# Altium PCB Quadruped_Shield_PCB_Rev2.PcbDoc
Units mil, origin at the board's own origin, x right, y up, seen from the top; angles counter-clockwise.
Board outline 5000 x 3940 mil, 2 copper layers (Top Layer, Bottom Layer); 67 components, 106 nets, 436 pads, 58 vias.
Unrouted connection lines stored in the file: 66.
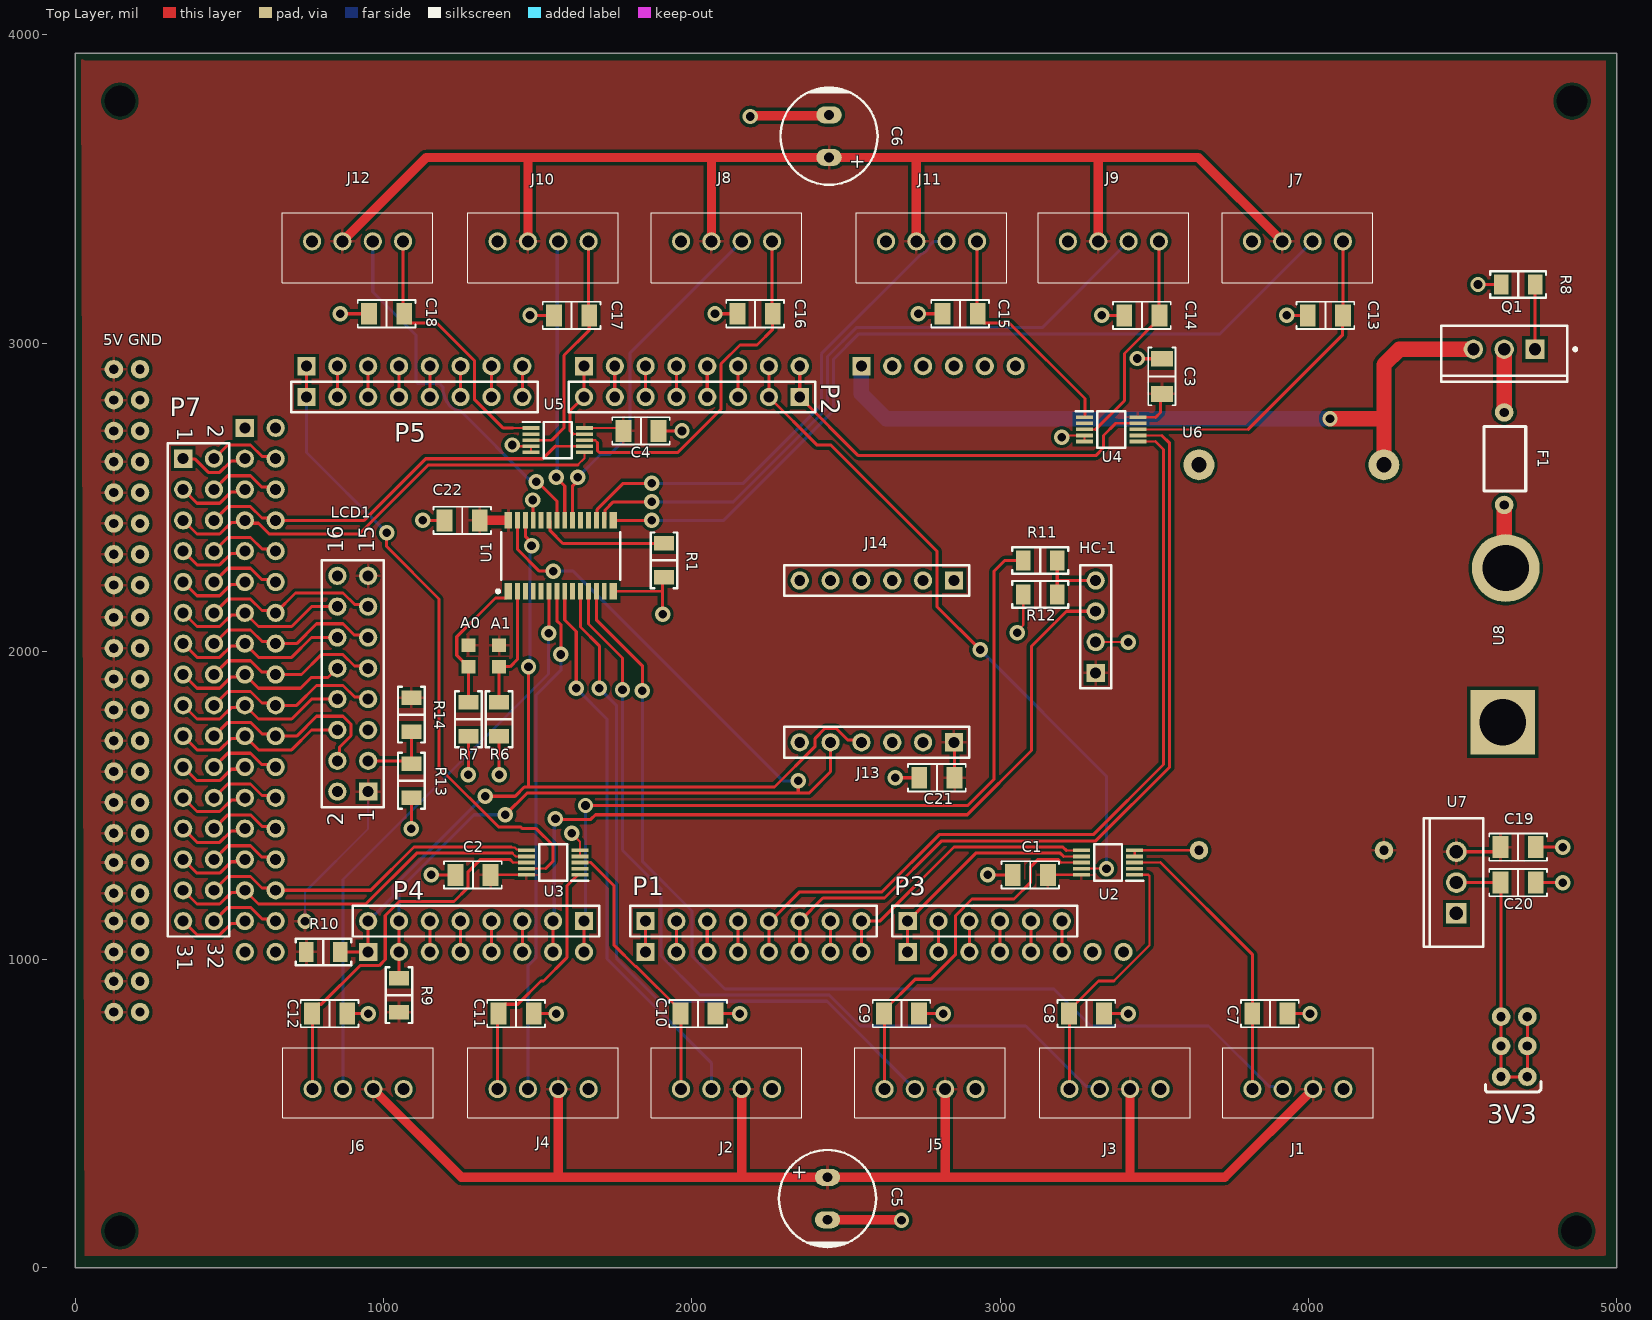
[diagram p0: Top Layer view]
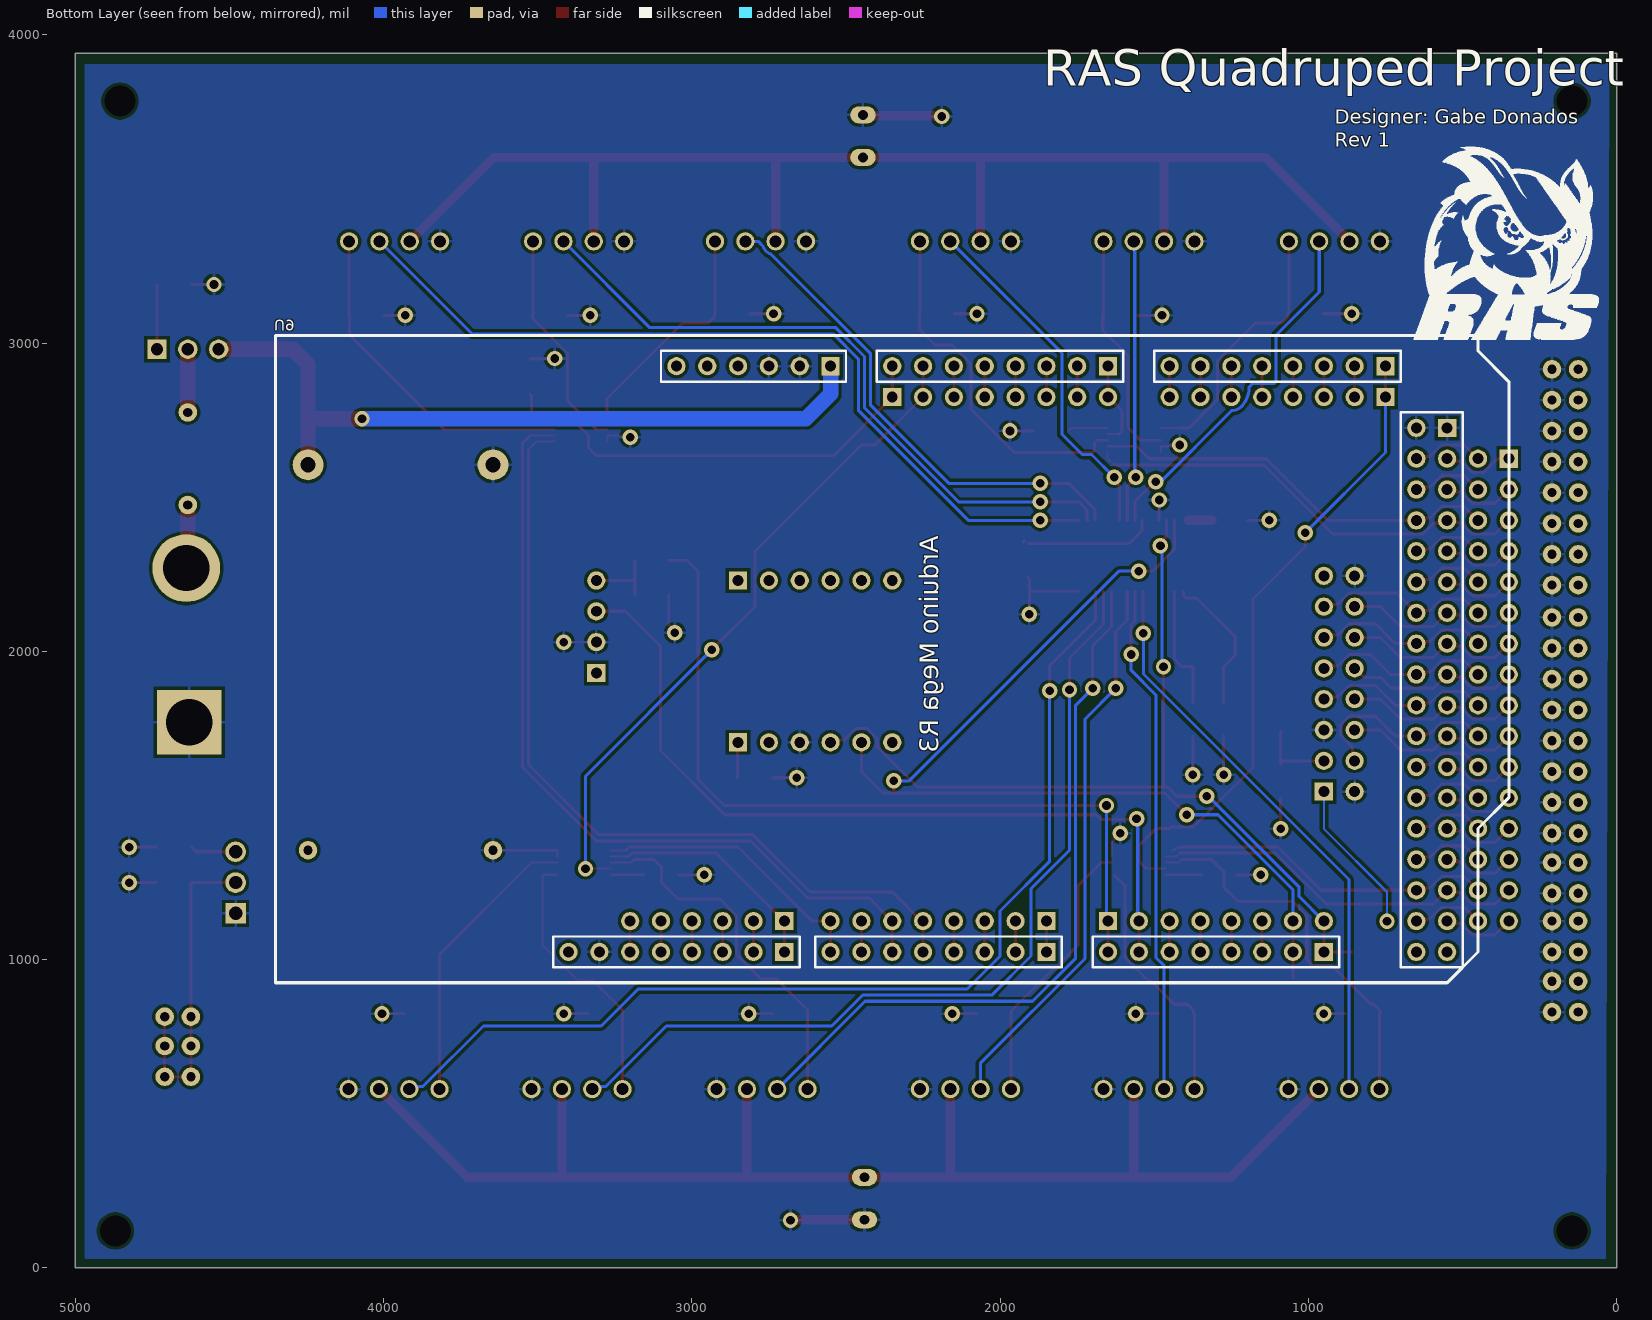
[diagram p1: Bottom Layer view, seen from below]
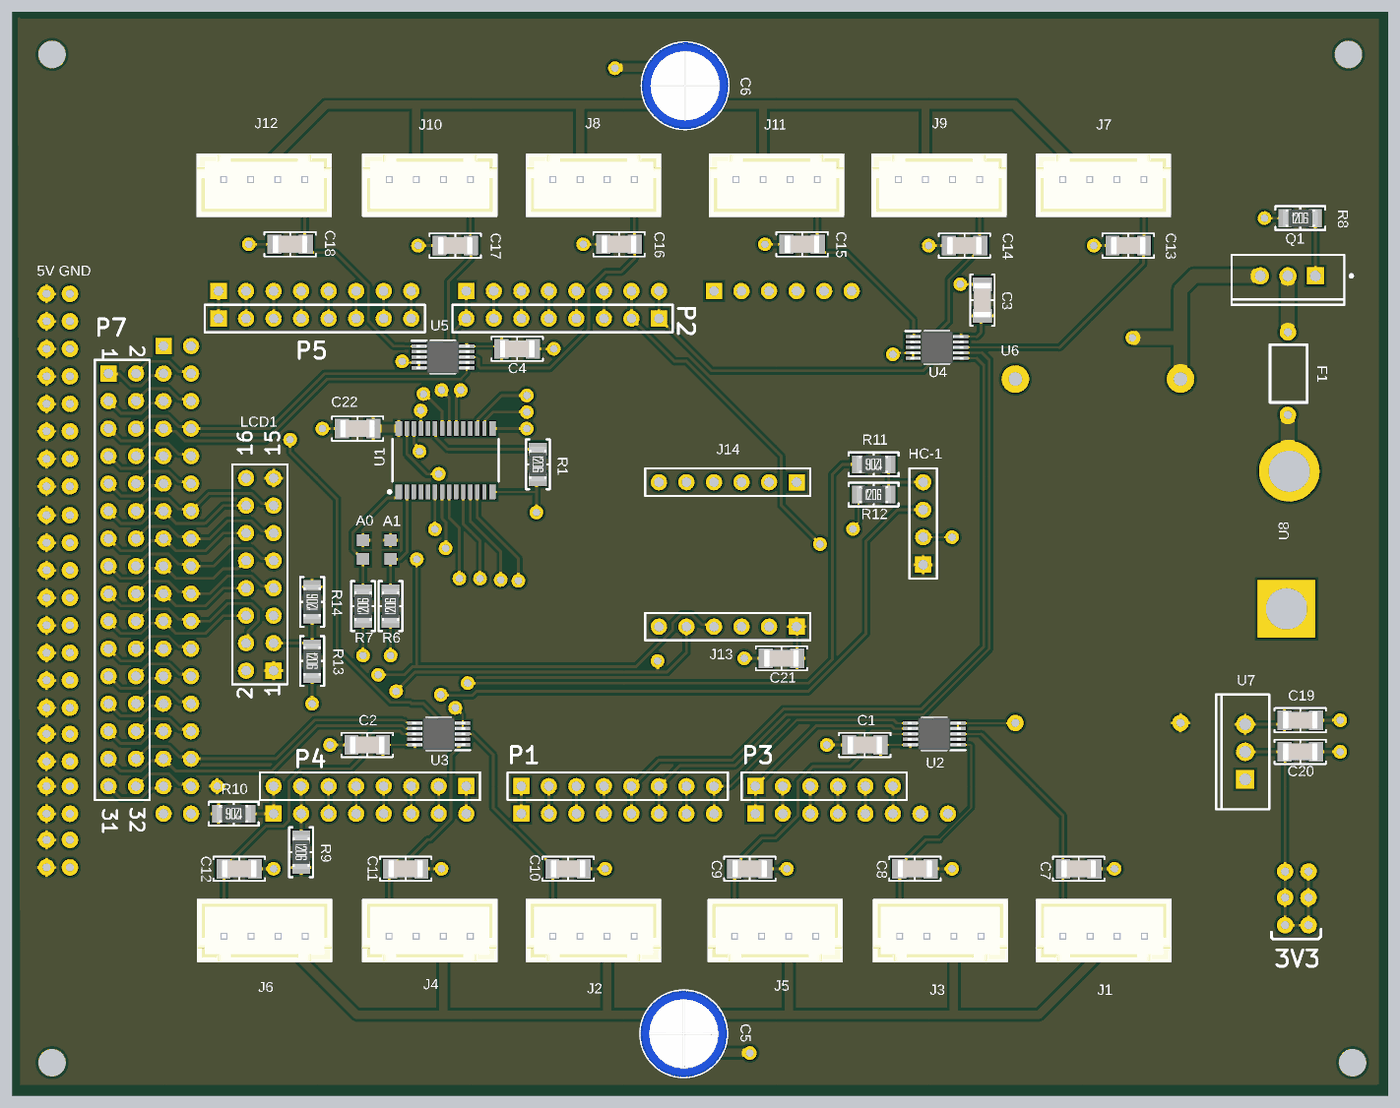
[diagram p2: 3D render of the assembled board from above, using the file's embedded part models]

## Layer stack, top to bottom
Top Solder: solder mask 0.4, Solder Resist, Dk 3.5
Top Layer: signal copper 1.4
Dielectric 1: dielectric 12.6, FR-4, Dk 4.8
Bottom Layer: signal copper 1.4
Bottom Solder: solder mask 0.4, Solder Resist, Dk 3.5

## Board outline
0,0 5000,0 5000,3940 0,3940

## Design rules (kind name [scope] priority, off if disabled: settings)
Clearance [All] p1: gap=10 ignorepadtopadclearanceinfootprint=FALSE except(0: Arc-Hole Track-Hole SMDPad-Hole THPad-Hole Via-Hole Fill-Hole Poly-Hole Region-Hole Text-Hole; 5: SMDPad-SMDPad)
HoleSize [All] p1: absolutevalues=TRUE maxlimit=200 minlimit=1 maxpercent=80.000 minpercent=20.000
MinimumSolderMaskSliver MinimumSolderMaskSliver_1 [HasFootprint('SOT361-1_V')] p1: minsoldermaskwidth=1
PolygonConnect [All] p1: connectstyle=Relief reliefconductorwidth=10 reliefentries=4 polygonreliefangle="90 Angle" airgapwidth=10
RoomDefinition U_MPU_Schem [InComponentClass('U_MPU_Schem')] p1 off: confinementstyle=ConfineIn formatcopy=TRUE lockcomponents=FALSE outline 2030.12,1180 3235.12,1180 3235.12,2410 2030.12,2410
RoomDefinition U_Power_Circuit [InComponentClass('U_Power_Circuit')] p2 off: confinementstyle=ConfineIn formatcopy=TRUE lockcomponents=FALSE outline 3540,1005 5005,1005 5005,3305 3540,3305
RoomDefinition U_PWM_BoardSchem [InComponentClass('U_PWM_BoardSchem')] p3 off: confinementstyle=ConfineIn formatcopy=TRUE lockcomponents=FALSE outline 243.11,-285 5155,-285 5155,3945 243.11,3945
RoomDefinition Main_Board [InComponentClass('Main_Board')] p4 off: confinementstyle=ConfineIn formatcopy=TRUE lockcomponents=FALSE outline -565,-385 5055,-385 5055,3795 -565,3795
RoomDefinition U_LCD_Schem [InComponentClass('U_LCD_Schem')] p5 off: confinementstyle=ConfineIn formatcopy=TRUE lockcomponents=FALSE outline 670,1425 1400,1425 1400,2490 670,2490
RoomDefinition U_HC06_Schem [InComponentClass('U_HC06_Schem')] p6 off: confinementstyle=ConfineIn formatcopy=TRUE lockcomponents=FALSE outline 2765,1840 3495,1840 3495,2360 2765,2360
RoutingVias [All] p1: holewidth=28 width=50 viastyle="Through Hole" minholewidth=28 minwidth=50 maxholewidth=28 maxwidth=50
SilkToSolderMaskClearance [IsPad] p1: minsilkscreentomaskgap=5 clearancetoexposedcopper=TRUE
SolderMaskExpansion [All] p1: expansion=4 istentingtop=FALSE
Width [All] p1: maxlimit=50 minlimit=5 preferedwidth=10
27 further rules are at their usual default settings.

## Classes and differential pairs
component class U_PWM_BoardSchem: A0 A1 C1 C2 C3 C4 C5 C6 C7 C8 C9 C10 C11 C12 C13 C14 C15 C16 C17 C18 C22 J1 J2 J3 J4 J5 J6 J7 J8 J9 J10 J11 J12 R1 R6 R7 U1 U2 U3 U4 U5
component class U_Power_Circuit: C19 C20 F1 Q1 R8 U6 U7 U8
component class U_MPU_Schem: C21 J13 J14
component class U_LCD_Schem: LCD1 R13 R14
component class U_HC06_Schem: HC-1 R11 R12
component class Main_Board: P1 P2 P3 P4 P5 P7 R9 R10 U9

## Components (designator, comment, footprint, x,y, rotation, side; value= is the part's Value field where it differs from the comment)
A0 "SB" CAPC2010X06N 1275,1985 r270 top
A1 "SB" CAPC2010X06N 1375,1985 r270 top
C1 "0.1 µF" "CAP 1206_3216 - 0.8MM" 3097.91,1275 r0 top
C2 "0.1 µF" "CAP 1206_3216 - 0.8MM" 1290,1275 r0 top
C3 "0.1 µF" "CAP 1206_3216 - 0.8MM" 3525,2892.09 r270 top
C4 "0.1 µF" "CAP 1206_3216 - 0.8MM" 1835,2715 r180 top
C5 "330 µF" "CAP TH ALPOLY D8.00mm S3.50mm H9.00mm" 2440,225 r90 top
C6 "330 µF" "CAP TH ALPOLY D8.00mm S3.50mm H9.00mm" 2445,3671.1 r270 top
C7 "0.1 µF" "CAP 1206_3216 - 0.8MM" 3875,825 r180 top
C8 "0.1 µF" "CAP 1206_3216 - 0.8MM" 3280,825 r180 top
C9 "0.1 µF" "CAP 1206_3216 - 0.8MM" 2680,825 r180 top
C10 "0.1 µF" "CAP 1206_3216 - 0.8MM" 2020,825 r180 top
C11 "0.1 µF" "CAP 1206_3216 - 0.8MM" 1430,825 r180 top
C12 "0.1 µF" "CAP 1206_3216 - 0.8MM" 825,825 r180 top
C13 "0.1 µF" "CAP 1206_3216 - 0.8MM" 4055,3090 r0 top
C14 "0.1 µF" "CAP 1206_3216 - 0.8MM" 3460,3090 r0 top
C15 "0.1 µF" "CAP 1206_3216 - 0.8MM" 2870,3095 r0 top
C16 "0.1 µF" "CAP 1206_3216 - 0.8MM" 2205,3095 r0 top
C17 "0.1 µF" "CAP 1206_3216 - 0.8MM" 1610,3090 r0 top
C18 "0.1 µF" "CAP 1206_3216 - 0.8MM" 1010,3095 r0 top
C19 "0.33F" "CAP 1206_3216 - 0.8MM" 4680,1365 r180 top
C20 "0.1 µF" "CAP 1206_3216 - 0.8MM" 4680,1250 r180 top
C21 "0.1 µF" "CAP 1206_3216 - 0.8MM" 2795,1590 r0 top
C22 "0.1 µF" "CAP 1206_3216 - 0.8MM" 1255,2425 r180 top
F1 "Through Hole Fuse" "Through Hole Fuse-Footprint-1" 4640,2625 r90 top
HC-1 "Header 4" HDR1X4 3310,1930 r90 top
J1 "B4B-XH-A_LF__SN_" B4BXHALFSN 3818.15,580 r0 top locked
J2 "B4B-XH-A_LF__SN_" B4BXHALFSN 1964.72,580 r0 top locked
J3 "B4B-XH-A_LF__SN_" B4BXHALFSN 3224.72,580 r0 top locked
J4 "B4B-XH-A_LF__SN_" B4BXHALFSN 1369.72,580 r0 top locked
J5 "B4B-XH-A_LF__SN_" B4BXHALFSN 2624.72,580 r0 top locked
J6 "B4B-XH-A_LF__SN_" B4BXHALFSN 769.72,580 r0 top locked
J7 "B4B-XH-A_LF__SN_" B4BXHALFSN 4111.85,3330 r180 top locked
J8 "B4B-XH-A_LF__SN_" B4BXHALFSN 2260.28,3330 r180 top locked
J9 "B4B-XH-A_LF__SN_" B4BXHALFSN 3515,3330 r180 top locked
J10 "B4B-XH-A_LF__SN_" B4BXHALFSN 1665,3330 r180 top locked
J11 "B4B-XH-A_LF__SN_" B4BXHALFSN 2925,3330 r180 top locked
J12 "B4B-XH-A_LF__SN_" B4BXHALFSN 1063.43,3330 r180 top locked
J13 "" HDR1X6 2850,1705 r180 top locked
J14 "" HDR1X6 2850,2230 r180 top locked
LCD1 "Header 8X2" HDR2X8 950,1545 r90 top
P1 "Header 8" HDR1X8 1850,1125 r0 top
P2 "Header 8" HDR1X8 2350,2825 r180 top
P3 "Header 6" HDR1X6 2700,1125 r0 top
P4 "Header 8" HDR1X8 1650,1125 r180 top
P5 "Header 8" HDR1X8 750,2825 r0 top
P7 "Header 16X2" HDR2X16 350,2625 r270 top
Q1 "SPP15P10P H" INF-PG-TO220-3-1_A_V 4635,2980 r270 top
R1 "10K" "RES 1206_3216" 1910,2295.12 r270 top value="10 kOhms"
R6 "10K" "RES 1206_3216" 1375,1779.88 r90 top value="10 kOhms"
R7 "10K" "RES 1206_3216" 1275,1779.88 r90 top value="10 kOhms"
R8 "100" "RES 1206_3216" 4680,3190 r0 top value="10 kOhms"
R9 "10K" "RES 1206_3216" 1050,885 r270 top value="10 kOhms"
R10 "10K" "RES 1206_3216" 805,1025 r180 top value="10 kOhms"
R11 "1k" "RES 1206_3216" 3130,2295 r180 top value="10 kOhms"
R12 "1k" "RES 1206_3216" 3130,2185 r0 top value="10 kOhms"
R13 "1k" "RES 1206_3216" 1090,1580 r270 top value="10 kOhms"
R14 "47k" "RES 1206_3216" 1090,1795 r90 top value="10 kOhms"
U1 "PCA9685PW,112" SOT361-1_V 1575,2310 r90 top
U2 "MAX4524LEUB+" SOP50P490X110-10N 3350,1315 r180 top
U3 "MAX4524LEUB+" SOP50P490X110-10N 1550,1315 r180 top
U4 "MAX4524LEUB+" SOP50P490X110-10N 3360,2720 r0 top
U5 "MAX4524LEUB+" SOP50P490X110-10N 1565,2685 r0 top
U6 "5V 3A Buck Converter" "5V 3A Buck Converter-Footprint-1" 3945,2000 r270 top
U7 "LD1117" "PCB - LEADED - TO - TO-220" 4480,1250 r180 top
U8 "3S LiPo Input" "3S LiPo Input-Footprint-2" 4635,2020 r90 top
U9 "ARDUINO MEGA" "ARDUINO MEGA" 2250,1925 r180 bottom locked

## Footprints (in the part's own frame and the unit in brackets; to place one, negate y for a bottom-side part, rotate by r counter-clockwise, add the part's x,y. Pads: shape width x height; smd on the part's side, far side on the other; paste and mask are expansions set on the pad)
"3S LiPo Input-Footprint-2" [mil]
  round 220 hole 150: 1(250,-5)
  rect 210x210 hole 150: 2(-250,5)
"5V 3A Buck Converter-Footprint-1" [mil]
  round 100 hole 50: 1(-605,300) 2(-605,-300)
  round 60 hole 30: 3(645,-300) 4(645,300)
"ARDUINO MEGA" [mm] "Arduino Mega 2560"
  rect 1.5x1.5 hole 0.9: 0(10.16,-22.86) 8(-11.43,-22.86) 21(33.02,-22.86) 59(-7.62,25.4) 67(15.24,25.4) 75(38.1,25.4) 79(43.18,20.32)
  round 1.5 hole 0.9: 1(7.62,-22.86) 2(5.08,-22.86) 3(2.54,-22.86) 4(0,-22.86) 5(-2.54,-22.86) 6(-5.08,-22.86) 7(-7.62,-22.86) 9(-13.97,-22.86) 10(-16.51,-22.86) 11(-19.05,-22.86) 12(-21.59,-22.86) 13(-24.13,-22.86) 14(15.24,-22.86) 15(17.78,-22.86) 16(20.32,-22.86) 17(22.86,-22.86) 18(25.4,-22.86) 19(27.94,-22.86) 20(30.48,-22.86) 22(40.64,-20.32) 23(43.18,-20.32) 24(40.64,-17.78) 25(43.18,-17.78) 26(40.64,-15.24) 27(43.18,-15.24) 28(40.64,-12.7) 29(43.18,-12.7) 30(40.64,-10.16) 31(43.18,-10.16) 32(40.64,-7.62) 33(43.18,-7.62) 34(40.64,-5.08) 35(43.18,-5.08) 36(40.64,-2.54) 37(43.18,-2.54) 38(40.64,0) 39(43.18,0) 40(40.64,2.54) 41(43.18,2.54) 42(40.64,5.08) 43(43.18,5.08) 44(40.64,7.62) 45(43.18,7.62) 46(40.64,10.16) 47(43.18,10.16) 48(40.64,12.7) 49(43.18,12.7) 50(40.64,15.24) 51(43.18,15.24) 52(40.64,17.78) 53(43.18,17.78) 54(-20.32,25.4) 55(-17.78,25.4) 56(-15.24,25.4) 57(-12.7,25.4) 58(-10.16,25.4) 60(-2.54,25.4) 61(0,25.4) 62(2.54,25.4) 63(5.08,25.4) 64(7.62,25.4) 65(10.16,25.4) 66(12.7,25.4) 68(20.32,25.4) 69(22.86,25.4) 70(25.4,25.4) 71(27.94,25.4) 72(30.48,25.4) 73(33.02,25.4) 74(35.56,25.4) 76(-26.67,-22.86) 77(-29.21,-22.86) 78(40.64,20.32) 80(43.18,-22.86) 81(40.64,-22.86)
  silkscreen extent -53.34,-25.4 48.26,27.94
B4BXHALFSN [mm]
  round 1.5 hole 1: 1(0,0) 2(2.5,0) 3(5,0) 4(7.5,0)
  silkscreen extent -2.45,-2.35 9.95,3.4, body extent -2.45,-2.35 9.95,3.4, height 7.52
"CAP 1206_3216 - 0.8MM" [mm] "Chip Capacitor, 2-Leads, Body 3.25x1.60mm, IPC Medium Density"
  rect 1.3x1.8 smd: 1(-1.45,0) 2(1.45,0)
  silkscreen extent -2.38,-1.13 2.38,1.13, body extent -1.6,-0.8 1.6,0.8, height 0.8
"CAP TH ALPOLY D8.00mm S3.50mm H9.00mm" [mm] "8.00mm Diameter 9.00mm Lead Spacing Aluminum - Polymer Capacitors Radial, Can"
  oval 1.4x2.1 hole 0.8: 1(1.75,0) 2(-1.75,0)
  silkscreen extent -4,-4 4,4, body extent -4.01,-4 4,4, height 9
CAPC2010X06N [mm] "Chip Capacitor, 2-Leads, Body 2.00x1.00mm, IPC Medium Density"
  rect 1.1x1.15 smd: 1(-0.875,0) 2(0.875,0)
  body extent -1,-0.5 1,0.5, height 0.6
HDR1X4 [mm] "Connector; Header; 4 Position"
  rect 1.5x1.5 hole 0.9: 1(0,0)
  round 1.5 hole 0.9: 2(2.54,0) 3(5.08,0) 4(7.62,0)
  silkscreen extent -1.27,-1.27 8.89,1.27
HDR1X6 [mm] "Connector; Header; 6 Position"
  rect 1.5x1.5 hole 0.9: 1(0,0)
  round 1.5 hole 0.9: 2(2.54,0) 3(5.08,0) 4(7.62,0) 5(10.16,0) 6(12.7,0)
  silkscreen extent -1.27,-1.27 13.97,1.27
HDR1X8 [mm] "Connector; Header; 8 Position"
  rect 1.5x1.5 hole 0.9: 1(0,0)
  round 1.5 hole 0.9: 2(2.54,0) 3(5.08,0) 4(7.62,0) 5(10.16,0) 6(12.7,0) 7(15.24,0) 8(17.78,0)
  silkscreen extent -1.27,-1.27 19.05,1.27
HDR2X8 [mm] "Connector; Header; 8x2 Position"
  rect 1.5x1.5 hole 0.9: 1(0,0)
  round 1.5 hole 0.9: 2(0,2.54) 3(2.54,0) 4(2.54,2.54) 5(5.08,0) 6(5.08,2.54) 7(7.62,0) 8(7.62,2.54) 9(10.16,0) 10(10.16,2.54) 11(12.7,0) 12(12.7,2.54) 13(15.24,0) 14(15.24,2.54) 15(17.78,0) 16(17.78,2.54)
  silkscreen extent -1.27,-1.27 19.05,3.81
HDR2X16 [mm] "Connector; Header; 16x2 Position"
  rect 1.5x1.5 hole 0.9: 1(0,0)
  round 1.5 hole 0.9: 2(0,2.54) 3(2.54,0) 4(2.54,2.54) 5(5.08,0) 6(5.08,2.54) 7(7.62,0) 8(7.62,2.54) 9(10.16,0) 10(10.16,2.54) 11(12.7,0) 12(12.7,2.54) 13(15.24,0) 14(15.24,2.54) 15(17.78,0) 16(17.78,2.54) 17(20.32,0) 18(20.32,2.54) 19(22.86,0) 20(22.86,2.54) 21(25.4,0) 22(25.4,2.54) 23(27.94,0) 24(27.94,2.54) 25(30.48,0) 26(30.48,2.54) 27(33.02,0) 28(33.02,2.54) 29(35.56,0) 30(35.56,2.54) 31(38.1,0) 32(38.1,2.54)
  silkscreen extent -1.27,-1.27 39.37,3.81
INF-PG-TO220-3-1_A_V [mm] "FM, 3-Leads, Body 10.03x8.98mm, Pitch 2.54mm"
  rect 1.6x1.6 hole 1: 1(0,2.54)
  round 1.6 hole 1: 2(0,0) 3(0,-2.54)
  silkscreen extent -1.93,-5.2 2.67,5.98, body extent -1.93,-5.2 2.67,5.2, height 20.75
"PCB - LEADED - TO - TO-220" [mm]
  rect 1.7x1.7 hole 1.1: 1(0,2.54)
  round 1.7 hole 1.1: 2(0,0) 3(0,-2.54)
  silkscreen extent -2.21,-5.3 2.68,5.3, body extent -2.19,-5.28 2.66,5.28, height 19.85
"RES 1206_3216" [mm] "Chip Resistor, 2-Leads, Body 3.13x1.55mm, IPC Medium Density"
  rect 1.2x1.65 smd: 1(-1.4,0) 2(1.4,0)
  silkscreen extent -2.3,-1.1 2.3,1.1, body extent -1.6,-0.8 1.6,0.8, height 0.6
SOP50P490X110-10N [mm]
  rect 1.4x0.3 smd: 1(-2.2,1) 2(-2.2,0.5) 3(-2.2,0) 4(-2.2,-0.5) 5(-2.2,-1) 6(2.2,-1) 7(2.2,-0.5) 8(2.2,0) 9(2.2,0.5) 10(2.2,1)
  silkscreen extent -2.9,-1.5 1.15,1.5, body extent -2.45,-1.5 2.45,1.5, height 1.1
SOT361-1_V [mm] "SOP, 28-Leads, Body 9.7x4.4mm, Pitch 0.65mm, NXP Recommended"
  rect 1.35x0.6 smd: 1(-2.925,4.325) 14(-2.925,-4.325) 15(2.925,-4.325) 28(2.925,4.325)
  rect 1.35x0.4 smd: 2(-2.925,3.575) 3(-2.925,2.925) 4(-2.925,2.275) 5(-2.925,1.625) 6(-2.925,0.975) 7(-2.925,0.325) 8(-2.925,-0.325) 9(-2.925,-0.975) 10(-2.925,-1.625) 11(-2.925,-2.275) 12(-2.925,-2.925) 13(-2.925,-3.575) 16(2.925,-3.575) 17(2.925,-2.925) 18(2.925,-2.275) 19(2.925,-1.625) 20(2.925,-0.975) 21(2.925,-0.325) 22(2.925,0.325) 23(2.925,0.975) 24(2.925,1.625) 25(2.925,2.275) 26(2.925,2.925) 27(2.925,3.575)
  silkscreen extent -3.05,-4.9 1.96,5.3, body extent -2.2,-4.85 2.2,4.85, height 1.1
"Through Hole Fuse-Footprint-1" [mil]
  round 60 hole 30: 1(-150,5) 2(150,5)
  silkscreen extent -105,-65 105,70

## Part data
A0 A1: library part CMP-00004-5, "Solder Bridge/0 ohm"
C1 C2 C3 C4 C7 C8 C9 C10 C11 C12 C13 C14 C15 C16 C17 C18 C20 C21 C22: library part CC1206ZRY5V9BB104, "CAP CER 0.1UF 50V Y5V 1206", Device Package="1206 (3216 Metric)", manufacturer=Yageo, Operating Temperature="-30°C ~ 85°C", Supplier Part Number 1=311-4505-1-ND, Temperature Coefficient="Y5V (F)", Tolerance="-20%, +80%", Voltage - Rated=50V, Applications="General Purpose", Capacitance="0.1 µF", componentlink1description=Datasheet, componentlink1url=http://www.yageo.com/NewPortal/_en/search/productDocs.jsp?YageoPartNumber=CC1206ZRY5V9BB104, componentlink2description="DigiKey Link", componentlink2url=https://www.digikey.com/en/products/detail/yageo/CC1206ZRY5V9BB104/5884687, lastupdated="9/19/2022 1:06:25 PM", Lifecycle Status=Active, Minimum Order=1, Mounting Type="Surface Mount, MLCC", Package / Case="1206 (3216 Metric)", packaging=TapeAndReel, Part Number=CC1206ZRY5V9BB104, Part Status=Active, partid=18813, price=0.04, series=CC, Size / Dimension="0.126\" L x 0.063\" W (3.20mm x 1.60mm)", Supplier 1=DigiKey, Thickness (Max)="0.028\" (0.70mm)"
C5 C6: library part RL81C331MDN1KX, "CAP ALUM POLY 330UF 20% 16V T/H", Device Package="Radial, Can", ESR (Equivalent Series Resistance)=12mOhm, Lifetime @ Temp.="2000 Hrs @ 105°C", manufacturer=Nichicon, Operating Temperature="-55°C ~ 105°C", Ripple Current @ High Frequency="5 A @ 100 kHz", Ripple Current @ Low Frequency="500 mA @ 120 Hz", Supplier Part Number 1=493-6629-1-ND, Tolerance=±20%, Voltage - Rated="16 V", Applications="General Purpose", Capacitance="330 µF", componentlink1description=Datasheet, componentlink1url=http://nichicon-us.com/english/products/pdfs/e-rl8.pdf, componentlink2description="DigiKey Link", componentlink2url=https://www.digikey.com/en/products/detail/nichicon/RL81C331MDN1KX/3465929, Height - Seated (Max)="0.354\" (9.00mm)", lastupdated="9/19/2022 2:07:31 PM", Lead Spacing="0.138\" (3.50mm)", Lifecycle Status=Active, Minimum Order=1, Mounting Type="Through Hole", Package / Case="Radial, Can", packaging=TapeAndBox, Part Number=RL81C331MDN1KX, Part Status=Active, partid=3754, price=0.43, series="FPCAP, RL8", Size / Dimension="0.315\" Dia (8.00mm)", Supplier 1=DigiKey, Type=Polymer
C19: library part CC1206ZRY5V9BB104, "CAP CER 0.1UF 50V Y5V 1206", Capacitance="0.1 µF", Device Package="1206 (3216 Metric)", manufacturer=Yageo, Operating Temperature="-30°C ~ 85°C", Supplier Part Number 1=311-4505-1-ND, Temperature Coefficient="Y5V (F)", Tolerance="-20%, +80%", Voltage - Rated=50V, Applications="General Purpose", componentlink1description=Datasheet, componentlink1url=http://www.yageo.com/NewPortal/_en/search/productDocs.jsp?YageoPartNumber=CC1206ZRY5V9BB104, componentlink2description="DigiKey Link", componentlink2url=https://www.digikey.com/en/products/detail/yageo/CC1206ZRY5V9BB104/5884687, lastupdated="9/19/2022 1:06:25 PM", Lifecycle Status=Active, Minimum Order=1, Mounting Type="Surface Mount, MLCC", Package / Case="1206 (3216 Metric)", packaging=TapeAndReel, Part Number=CC1206ZRY5V9BB104, Part Status=Active, partid=18813, price=0.04, series=CC, Size / Dimension="0.126\" L x 0.063\" W (3.20mm x 1.60mm)", Supplier 1=DigiKey, Thickness (Max)="0.028\" (0.70mm)"
F1: library part CMP-00003-2, "Fuse that be through the hole"
HC-1: "Header, 4-Pin", LatestRevisionDate=17-Jul-2002, LatestRevisionNote="Re-released for DXP Platform.", Publisher="Altium Limited"
J1 J2 J3 J4 J5 J6 J7 J8 J9 J10 J11 J12: "Connector", Arrow Part Number=B4B-XH-A(LF)(SN), Manufacturer_Name="JST (JAPAN SOLDERLESS TERMINALS)", Arrow Price/Stock=https://www.arrow.com/en/products/b4b-xh-a-lf-sn/jst-manufacturing, Datasheet Link=https://datasheet.lcsc.com/szlcsc/JST-Sales-America-B4B-XH-A-LF-SN_C144395.pdf, Height=7mm, Manufacturer_Part_Number=B4B-XH-A(LF)(SN)
J13 J14: library part "Header 6", "Header, 6-Pin", LatestRevisionDate=17-Jul-2002, LatestRevisionNote="Re-released for DXP Platform.", Publisher="Altium Limited"
LCD1: "Header, 8-Pin, Dual row", LatestRevisionDate=17-Jul-2002, LatestRevisionNote="Re-released for DXP Platform.", Publisher="Altium Limited"
P1 P2 P4 P5: "Header, 8-Pin", LatestRevisionDate=17-Jul-2002, LatestRevisionNote="Re-released for DXP Platform.", Publisher="Altium Limited"
P3: "Header, 6-Pin", LatestRevisionDate=17-Jul-2002, LatestRevisionNote="Re-released for DXP Platform.", Publisher="Altium Limited"
P7: "Header, 16-Pin, Dual row", LatestRevisionDate=17-Jul-2002, LatestRevisionNote="Re-released for DXP Platform.", Publisher="Altium Limited"
Q1: library part CMP-1099-00049-1, "P-Channel SIPMOS Small-Signal-Transistor, -100 V VDS, -15 A ID, -55 to 175 degC, PG-TO220-3-1, Tube, Green", manufacturer=Infineon, componentlink1description="Manufacturer URL", componentlink1url=http://www.infineon.com/, componentlink2description=Datasheet, componentlink2url=http://www.infineon.com/dgdl/SPP15P10P+H+G_Rev1.7.pdf?folderId=db3a304314dca38901154a72e3951a65&fileId=db3a3043321e49940132246d96be5a7e, ComponentLink3Description="Package Specification", ComponentLink3URL=http://www.infineon.com/dgdl/IPP028N08N3_Rev1%5B1%5D.0.pdf?folderId=db3a304313b8b5a60113cee8763b02d7&fileId=db3a30432313ff5e0123a3c08e7326b5, DatasheetVersion="Rev. 1.7", Green=TRUE, Halogen-free=TRUE, ID (max)="-15Â A", IDpuls (max)="-60Â A", Mounting Technology="Through Hole", PackageDescription="3-Pin Plastic (Green) Transistor Single Outline Package, 10.03 x 8.98 mm Body, 2.54 mm Pitch", PackageReference=PG-TO220-3-1, PackageVersion="Rev. 05, 08/2007", Packing=Tube, PartNumber="SPP15P10P H", Pto t (max)="128Â W", QG="37Â nC", RDS (on) (max)="240Â mOhm", Rth="1.17Â K/W", RthJC (max)="1.17Â K/W", VDS (max)="-100Â V", VGS(th) (max)="-2.1Â V", VGS(th) (min)="-4Â V"
R1 R6 R7 R8 R9 R10 R11 R12 R13 R14: library part ESR18EZPF1002, "RES SMD 10K OHM 1% 1/2W 1206", Device Package="1206 (3216 Metric)", manufacturer="Rohm Semiconductor", Operating Temperature="-55°C ~ 155°C", Power (Watts)="0.5W, 1/2W", Ratings=AEC-Q200, Resistance="10 kOhms", Supplier Device Package=1206, Supplier Part Number 1=RHM10.0KAFCT-ND, Temperature Coefficient=±100ppm/°C, Tolerance=±1%, componentlink1description=Datasheet, componentlink1url=https://www.rohm.com/datasheet/ESR01MZPF/esr-e, componentlink2description="DigiKey Link", componentlink2url=https://www.digikey.com/en/products/detail/rohm-semiconductor/ESR18EZPF1002/1983592, Composition="Thick Film", Features="Automotive AEC-Q200, Pulse Withstanding", Height - Seated (Max)="0.026\" (0.65mm)", lastupdated="9/19/2022 1:29:57 PM", Lifecycle Status=Active, Minimum Order=1, Number of Terminations=2, Package / Case="1206 (3216 Metric)", packaging=TapeAndReel, Part Number=ESR18EZPF1002, Part Status=Active, partid=26965, price=0.02, series=ESR, Size / Dimension="0.126\" L x 0.063\" W (3.20mm x 1.60mm)", Supplier 1=DigiKey
U1: library part CMP-1595-00004-2, "16-Channel, 12-Bit PWM Fm+ I2C-Bus LED Controller, 2.3 to 5.5 V, -40 to 85 degC, 28-Pin TSSOP (SOT361-1), RoHS, Tape and Reel", Frequency="25000000 Hz", PartNumber=PCA9685, Supply Current Max="10 mA", Supply Voltage Max="5.5 V", Supply Voltage Min="2.3 V", Temperature Max="85 degC", Temperature Min="-40 degC", Code_JEDEC=MO-153, componentlink1description="Manufacturer URL", componentlink1url=http://www.nxp.com/, componentlink2description=Datasheet, componentlink2url=http://www.nxp.com/documents/data_sheet/PCA9685.pdf, ComponentLink3Description="Package Specification", ComponentLink3URL=http://www.nxp.com/documents/outline_drawing/sot361-1_po.pdf, DatasheetVersion="Rev. 4", Mounting Technology="Surface Mount", PackageDescription="28-Pin Small Outline Package, Body 9.7 x 4.4 mm, Pitch 0.65 mm", PackageVersion=02/2003, Packing="Tape and Reel", RoHS=TRUE
U2 U3 U4 U5: "Integrated Circuit", Manufacturer_Name="Maxim Integrated", Mouser Part Number=700-MAX4524LEUB+, Datasheet Link=https://datasheets.maximintegrated.com/en/ds/MAX4524L-MAX4525L.pdf, Height=1.1mm, Manufacturer_Part_Number=MAX4524LEUB+, Mouser Price/Stock=https://www.mouser.co.uk/ProductDetail/Maxim-Integrated/MAX4524LEUB%2b?qs=Mc2rGIXtnyWlO7eYhLJKZQ%3D%3D
U6: library part CMP-00002-2, "Adafruit RC Buck converter"
U7: library part 776, "Linear Voltage Regulator IC  1 Output  1A TO-220AB", Dropout Voltage="1.3V @ 1A", manufacturer=STMicroelectronics, Manufacturer part number=LD1117AV33, Output Current=1A, Package=TO-220-3, Supplier Part Number 1=497-1485-5-ND, Voltage - Input (Max)=15V, Voltage - Output (Max)=-, Voltage - Output (Min or Fixed)=3.3V, Base Part Number=LD1117, Category="Linear Regulators", Datasheet=http://www.st.com/content/ccc/resource/technical/document/datasheet/a5/c3/3f/c9/2b/15/40/49/CD00002116.pdf/files/CD00002116.pdf/jcr:content/translations/en.CD00002116.pdf, Name="LD1117 - 3.3V Linear Regulator", Output Configuration=Positive, Output Type=Fixed, packaging=Tube, Rowan Part Number=776, Status=Active, Supplier 1=Digi-Key, Type="Linear Regulator"
U8: library part CMP-00000-1

## Free pads (board coordinates)
  round 60 hole 30: 37(125,830) 37(125,1025) 37(125,1215) 37(125,1410) 37(125,2215) 37(210,830) 37(210,1025) 37(210,1215) 37(210,1410) 37(210,2215) 37(4625,620) 37(4625,815) 37(4710,620) 37(4710,815) 39(125,930) 39(125,1125) 39(125,1315) 39(125,1510) 39(125,2315) 39(210,930) 39(210,1125) 39(210,1315) 39(210,1510) 39(210,2315) 39(4625,720) 39(4710,720) 40(125,1610) 40(125,2415) 40(210,1610) 40(210,2415) 41(125,1710) 41(125,2515) 41(210,1710) 41(210,2515) 42(125,1810) 42(125,2615) 42(210,1810) 42(210,2615) 43(125,1910) 43(125,2715) 43(210,1910) 43(210,2715) 44(125,2010) 44(125,2815) 44(210,2010) 44(210,2815) 45(125,2110) 45(125,2915) 45(210,2110) 45(210,2915)
  round 60 hole 100: 54(145,120) 54(145,3785) 54(4855,3785) 54(4870,120)

## Via types
v1: diameter 50, hole 28, Top Layer to Bottom Layer, 58 vias

## Nets (pads, with @x,y where several pads share a name; then routed paths per layer and width w, separated by ;. In a path a pad name is that pad's centre, name@x,y a point inside that pad or via, vN(x,y) a via of type N, cw(c..) or ccw(c..) an arc to the next point about the centre after c; other vN are vias at no path point)
3.3V: C20.2 pad.37@4625,620 pad.37@4625,815 pad.37@4710,620 pad.37@4710,815 pad.39@4625,720 pad.39@4710,720 U7.2 | length 1053.8
  Top Layer w10: U7.2 C20.2 4625,1247.91 4625,815 4625,720 4625,620 4710,620 4710,720 pad.37@4710,815
22: P7.32 U9.22 | length 236.9
  Top Layer w10: P7.32 494.53,1169.53 568.44,1169.53 605.47,1132.5 642.5,1132.5 U9.22
23: P7.31 U9.23 | length 236.9
  Top Layer w10: P7.31 394.53,1080.47 468.44,1080.47 505.47,1117.5 542.5,1117.5 U9.23
26: P7.28 U9.26 | length 236.9
  Top Layer w10: P7.28 494.53,1369.53 568.44,1369.53 605.47,1332.5 642.5,1332.5 U9.26
27: P7.27 U9.27 | length 236.9
  Top Layer w10: P7.27 394.53,1280.47 468.44,1280.47 505.47,1317.5 542.5,1317.5 U9.27
28: P7.26 U9.28 | length 236.9
  Top Layer w10: P7.26 494.53,1469.53 568.44,1469.53 605.47,1432.5 642.5,1432.5 U9.28
29: P7.25 U9.29 | length 236.9
  Top Layer w10: P7.25 394.53,1380.47 468.44,1380.47 505.47,1417.5 542.5,1417.5 U9.29
30: P7.24 U9.30 | length 236.9
  Top Layer w10: P7.24 494.53,1569.53 568.44,1569.53 605.47,1532.5 642.5,1532.5 U9.30
31: P7.23 U9.31 | length 236.9
  Top Layer w10: P7.23 394.53,1480.47 468.44,1480.47 505.47,1517.5 542.5,1517.5 U9.31
32: P7.22 U9.32 | length 236.9
  Top Layer w10: P7.22 494.53,1669.53 568.44,1669.53 605.47,1632.5 642.5,1632.5 U9.32
33: P7.21 U9.33 | length 236.9
  Top Layer w10: P7.21 394.53,1580.47 468.44,1580.47 505.47,1617.5 542.5,1617.5 U9.33
44: P7.10 U9.44 | length 236.9
  Top Layer w10: P7.10 494.53,2269.53 568.44,2269.53 605.47,2232.5 642.5,2232.5 U9.44
45: P7.9 U9.45 | length 236.9
  Top Layer w10: P7.9 394.53,2180.47 468.44,2180.47 505.47,2217.5 542.5,2217.5 U9.45
46: P7.8 U9.46 | length 236.9
  Top Layer w10: P7.8 494.53,2369.53 568.44,2369.53 605.47,2332.5 642.5,2332.5 U9.46
47: P7.7 U9.47 | length 236.9
  Top Layer w10: P7.7 394.53,2280.47 468.44,2280.47 505.47,2317.5 542.5,2317.5 U9.47
+5: A0.1 A1.1 C1.2 C2.2 C3.2 C4.2 C5.1 C6.1 C19.2 C21.2 C22.1 HC-1.1 J1.3 J2.3 J3.3 J4.3 J5.3 J6.3 J7.3 J8.3 J9.3 J10.3 J11.3 J12.3 J13.1 LCD1.1 LCD1.15 pad.37@125,830 pad.37@125,1025 pad.37@125,1215 pad.37@125,1410 pad.37@125,2215 pad.39@125,930 pad.39@125,1125 pad.39@125,1315 pad.39@125,1510 pad.39@125,2315 pad.40@125,1610 pad.40@125,2415 pad.41@125,1710 pad.41@125,2515 pad.42@125,1810 pad.42@125,2615 pad.43@125,1910 pad.43@125,2715 pad.44@125,2010 pad.44@125,2815 pad.45@125,2110 pad.45@125,2915 R9.2 R10.2 R14.2 U1.28 U2.10 U3.10 U4.10 U5.10 U6.4 U7.3 | length 10144.4
  Top Layer w7: C2.2@1347.72,1275.63 U3.10 ; U5.10 1768.54,2724.37 C4.2 ; C1.2@3155.63,1275.63 U2.10 ; U4.10 3504.37,2759.37
  Top Layer w10: C2.2 C2.2@1347.72,1275.63 ; J13.1 2852.09,1702.91 C21.2 ; C1.2 C1.2@3155.63,1275.63 ; 3504.37,2759.37 3520,2775 3520,2830 C3.2 ; U7.3 4607.91,1350 C19.2
  Top Layer w30: J12.3 1138.78,3602.2 1470,3602.2 ; J6.3 1252.68,293.9 1565,293.9 ; C22.1 1390,2425 ; J10.3 1468.15,3600.35 1470,3602.2 ; J4.3 1566.57,295.47 1565,293.9 ; J8.3 2063.43,3600.63 2065,3602.2 ; J2.3 2161.57,295.47 2160,293.9 ; J11.3 2728.15,3599.05 2725,3602.2 ; J5.3 2821.57,295.47 2820,293.9 ; J9.3 3318.15,3599.05 3315,3602.2 ; J3.3 3421.57,295.47 3420,293.9 ; J7.3 3642.8,3602.2 3315,3602.2 ; J1.3 3728.9,293.9 3420,293.9 ; 1470,3602.2 2065,3602.2 ; 1565,293.9 2160,293.9 ; 2065,3602.2 C6.1 2725,3602.2 ; 2160,293.9 C5.1 2820,293.9 ; 2725,3602.2 3315,3602.2 ; 2820,293.9 3420,293.9
  Bottom Layer w7: v1(745,1125) 745,1219.49 950,1424.49 LCD1.1
+12: Q1.3 U6.1 U9.59 | length 2453.8
  Top Layer w50: v1(4070,2755) 4245,2755 ; U6.1 4245,2755 ; Q1.3 4295,2980 4245,2930 4245,2755
  Bottom Layer w50: U9.59 2550,2835 2630,2755 v1(4070,2755)
A0: A0.2 R7.2 U1.1 | length 466
  Top Layer w10: R7.2 A0.2 1274.02,1950.55 1237.36,1987.2 1237.36,2047.32 1363.31,2173.27 1397.91,2173.27 1404.72,2180.08 U1.1 U1.1@1405,2194.57
A1: A1.2 R6.2 U1.2 | length 405.8
  Top Layer w10: R6.2 A1.2 1410.55,1950.55 1435,1975 1435,2194.09 U1.2
D0: LCD1.7 P7.18 U9.36 | length 582.1
  Top Layer w10: P7.18 494.53,1869.53 568.44,1869.53 605.47,1832.5 642.5,1832.5 U9.36 718.12,1825 782.65,1889.53 868.44,1889.53 905.47,1852.5 942.5,1852.5 LCD1.7
D1: LCD1.8 P7.17 U9.37 | length 582.1
  Top Layer w10: P7.17 394.53,1780.47 468.44,1780.47 505.47,1817.5 542.5,1817.5 U9.37 594.53,1780.47 701.88,1780.47 766.4,1845 LCD1.8
D2: LCD1.9 P7.16 U9.38 | length 582.1
  Top Layer w10: P7.16 494.53,1969.53 568.44,1969.53 605.47,1932.5 642.5,1932.5 U9.38 733.6,1925 798.12,1989.53 868.44,1989.53 905.47,1952.5 942.5,1952.5 LCD1.9
D3: LCD1.10 P7.15 U9.39 | length 582.1
  Top Layer w10: P7.15 394.53,1880.47 468.44,1880.47 505.47,1917.5 542.5,1917.5 U9.39 594.53,1880.47 730.47,1880.47 765,1915 820,1915 LCD1.10
D4: LCD1.11 P7.14 U9.40 | length 582.1
  Top Layer w10: P7.14 494.53,2069.53 568.44,2069.53 605.47,2032.5 642.5,2032.5 U9.40 718.12,2025 782.65,2089.53 868.44,2089.53 905.47,2052.5 942.5,2052.5 LCD1.11
D5: LCD1.12 P7.13 U9.41 | length 582.1
  Top Layer w10: P7.13 394.53,1980.47 468.44,1980.47 505.47,2017.5 542.5,2017.5 U9.41 594.53,1980.47 701.88,1980.47 766.4,2045 LCD1.12
D6: LCD1.13 P7.12 U9.42 | length 582.1
  Top Layer w10: P7.12 494.53,2169.53 568.44,2169.53 605.47,2132.5 642.5,2132.5 U9.42 714.53,2189.53 868.44,2189.53 905.47,2152.5 942.5,2152.5 LCD1.13
D7: LCD1.14 P7.11 U9.43 | length 582.1
  Top Layer w10: P7.11 394.53,2080.47 468.44,2080.47 505.47,2117.5 542.5,2117.5 U9.43 594.53,2080.47 701.88,2080.47 766.4,2145 LCD1.14
FB1_in: P2.2 U2.9 U9.61 | length 2191.7
  Top Layer w7: U2.9 v1@3344.68,1295.32
  Top Layer w10: U9.61 P2.2 2405,2670 2450,2670 2794.53,2325.47 2794.53,2145.47 v1(2935,2005) ; v1@3344.68,1295.32 v1(3345,1295)
  Bottom Layer w10: v1(2935,2005) 3345,1595 v1(3345,1295)
FB2_in: P5.1 U3.9 U9.75 | length 2101.5
  Top Layer w7: U3.9 1525.32,1295.32
  Top Layer w10: P5.1 U9.75 ; v1(1010,2385) 1010,2340 1180,2170 1180,1623.43 1373.43,1430 1445,1430 1450,1425 1495,1425 1550,1370 1550,1320 1525.32,1295.32
  Bottom Layer w10: P5.1 750,2645 v1(1010,2385)
FB3_in: P2.1 U4.9 U9.60 | length 1342.1
  Top Layer w7: 3374.69,2739.69 U4.9
  Top Layer w10: U9.60 P2.1 2540,2635 3310,2635 3335,2660 3335,2700 3374.69,2739.69
FB4_in: P2.8 U5.9 U9.67 | length 279.5
  Top Layer w7: 1615.31,2704.69 U5.9
  Top Layer w10: 1615.31,2704.69 1605,2715 1605,2780 P2.8 U9.67
GND: C1.1 C2.1 C3.1 C4.1 C5.2 C6.2 C7.1 C8.1 C9.1 C10.1 C11.1 C12.1 C13.1 C14.1 C15.1 C16.1 C17.1 C18.1 C19.1 C20.1 C21.1 C22.2 HC-1.2 J1.4 J2.4 J3.4 J4.4 J5.4 J6.4 J7.4 J8.4 J9.4 J10.4 J11.4 J12.4 J13.3 LCD1.2 LCD1.5 LCD1.16 pad.37@210,830 pad.37@210,1025 pad.37@210,1215 pad.37@210,1410 pad.37@210,2215 pad.39@210,930 pad.39@210,1125 pad.39@210,1315 pad.39@210,1510 pad.39@210,2315 pad.40@210,1610 pad.40@210,2415 pad.41@210,1710 pad.41@210,2515 pad.42@210,1810 pad.42@210,2615 pad.43@210,1910 pad.43@210,2715 pad.44@210,2010 pad.44@210,2815 pad.45@210,2110 pad.45@210,2915 R1.2 R6.1 R7.1 R8.1 R12.1 R13.2 U1.14 U1.25 U2.4 U2.5 U3.4 U3.5 U4.4 U4.5 U5.4 U5.5 U6.2 U6.3 U7.1 U8.2 U9.57 U9.58 U9.76 U9.78 U9.79 | length 3551.1
  Top Layer w7: v1(1417.21,2669.36) 1421.57,2665 1430,2665 1430.32,2665.32 U5.4 U5.5 ; v1(1610,1410) 1636.61,1383.39 U3.5 U3.4 ; U1.14 1904.84,2194.84 1905,2195 ; v1(3055,2060) 3055,2065.24 3074.88,2085.12 R12.1 ; v1(3200,2695) 3200,2696.22 3204.1,2700.32 U4.4 U4.5 ; HC-1.2 v1(3415,2030) ; U2.4 U2.5 3436.93,1354.68 3644.69,1354.68 U6.3
  Top Layer w10: v1(860,3095) C18.1 ; C12.1 v1(950,825) ; v1(1090,1425) R13.2 ; v1(1127.09,2425) C22.2 ; v1(1155,1275) C2.1 ; v1(1275,1600) R7.1 ; v1(1375,1600) R6.1 ; v1(1475,3090) C17.1 ; v1(1484.27,2490.97) 1484.85,2490.39 1484.85,2425.74 U1.25 ; C11.1 v1(1560,825) ; C4.1 v1(1967.91,2715) ; v1(1905,2120) 1905,2195 1905,2235 R1.2 ; v1(2075,3095) C16.1 ; C10.1 v1(2155,825) ; v1(2660,1590) C21.1 ; v1@2678.9,156.1 v1(2680,155) ; v1(2735,3095) C15.1 ; C9.1 v1(2815,825) ; v1(2960,1275) C1.1 ; v1(3330,3090) C14.1 ; C8.1 v1(3415,825) ; v1(3445,2950) 3445.83,2949.17 C3.1 ; v1(3930,3090) C13.1 ; C7.1 v1(4005,825) ; v1(4550,3190) R8.1 ; C20.1 v1(4825,1250) ; C19.1 v1(4825,1365)
  Top Layer w30: v1(2190,3735) 2192.5,3737.5 2442.5,3737.5 C6.2 ; C5.2 v1@2678.9,156.1
HC_RX: P4.1 R11.2 U9.14 | length 2621.7
  Top Layer w10: U9.14 P4.1 ; v1(1655,1500) 2895,1500 2980,1585 2980,2260 3015,2295 R11.2
  Bottom Layer w10: P4.1 1655,1130 v1(1655,1500)
HC_TX: HC-1.3 P4.2 U9.15 | length 2666.9
  Top Layer w10: U9.15 P4.2 ; v1(1557.5,1457.5) 1560,1455 1672.43,1455 1687.43,1470 2893.28,1470 3101.95,1678.66 3101.95,2016.95 3215,2130 HC-1.3
  Bottom Layer w10: P4.2 1553.75,1128.75 1553.75,1453.75 v1(1557.5,1457.5)
LCD_EN: LCD1.6 P7.19 U9.35 | length 582.1
  Top Layer w10: P7.19 394.53,1680.47 468.44,1680.47 505.47,1717.5 542.5,1717.5 U9.35 594.53,1680.47 701.88,1680.47 766.4,1745 LCD1.6
LCD_Rs: LCD1.4 P7.20 U9.34 | length 655.8
  Top Layer w10: P7.20 494.53,1769.53 568.44,1769.53 605.47,1732.5 642.5,1732.5 U9.34 718.12,1725 782.65,1789.53 868.44,1789.53 894.53,1763.44 894.53,1726.56 857.5,1689.53 857.5,1652.5 LCD1.4
Leg1_fb0: C7.2 J1.1 U2.3 | length 941.9
  Top Layer w7: U2.3 3520,1315
  Top Layer w10: 3520,1315 3817.91,1017.09 C7.2 3818.15,824.76 J1.1
Leg1_fb1: C8.2 J3.1 U2.1 | length 878.3
  Top Layer w7: 3368.97,930.99 3484.73,1046.76 3484.73,1271.53 3480.63,1275.63 U2.1
  Top Layer w10: J3.1 3224.72,836.65 3319.07,930.99 3368.97,930.99
Leg1_fb2: C9.2 J5.1 U2.8 | length 1205.3
  Top Layer w7: 3197.24,1315 U2.8
  Top Layer w10: J5.1 2624.72,836.65 2724.54,936.47 2774.44,936.47 2855.47,1017.5 2855.47,1143.44 2908.67,1196.65 3044.71,1196.65 3097.91,1249.85 3097.91,1300.15 3123.2,1325.43 3186.8,1325.43 3197.24,1315
Leg1_MSel0: P3.1 U2.7 U9.8 | length 759.1
  Top Layer w7: 3205.84,1334.69 U2.7
  Top Layer w10: U9.8 P3.1 2920.43,1345.43 3195.09,1345.43 3205.84,1334.69
Leg1_MSel1: P1.8 U2.6 U9.7 | length 917.6
  Top Layer w7: 3214.44,1354.37 U2.6
  Top Layer w10: U9.7 P1.8 2610,1125 2850.43,1365.43 3203.37,1365.43 3214.44,1354.37
Leg1_PWM0: J1.2 U1.12 | length 3406.7
  Top Layer w10: U1.12 1690.16,2102.45 1839.26,1953.34 v1(1839.26,1871.7)
  Bottom Layer w10: v1(1839.26,1871.7) 1839.26,1319.02 2000.59,1157.7 2000.59,1011.44 2107.03,905 3174.15,905 3294.15,785 3676.12,785 3872.05,589.08 3907.5,589.08 J1.2
Leg1_PWM1: J3.2 U1.11 | length 2882.4
  Top Layer w10: U1.11 1664.57,2088.62 1775,1978.19 v1(1775,1875)
  Bottom Layer w10: v1(1775,1875) 1775,1355 1900,1230 1900,1012.03 2027.03,885 2446.43,885 2546.43,785 3082.7,785 3278.62,589.07 3314.08,589.07 J3.2
Leg1_PWM2: J5.2 U1.10 | length 2382.1
  Top Layer w10: U1.10 1638.98,2079.01 1700,2017.98 v1(1700,1880)
  Bottom Layer w10: v1(1700,1880) 1755,1825 1755,1005 1895,865 2438.15,865 J5.2
Leg2_fb0: C10.2 J2.1 U3.3 | length 893.6
  Top Layer w7: U3.3 1670.63,1315
  Top Layer w10: 1670.63,1315 1671.12,1315.49 1748,1238.61 1748,1046.73 1816.91,977.82 1819.94,977.82 1962.91,834.84 C10.2 1964.72,823.19 J2.1
Leg2_fb1: C11.2 J4.1 U3.1 | length 831.5
  Top Layer w10: J4.1 1369.72,821.81 C11.2 1372.91,834.84 1393.5,855.43 1435.28,855.43 1510.84,930.99 1518.97,930.99 1594.53,1006.56 1594.53,1238.94 U3.1@1630,1274.41
Leg2_fb2: C12.2 J6.1 U3.8 | length 1272
  Top Layer w7: 1420,1315 U3.8
  Top Layer w10: J6.1 769.72,823.19 C12.2 767.91,834.84 788.5,855.43 798.35,855.43 923.39,980.47 985.74,980.47 1005.47,1000.2 1005.47,1143.44 1050.43,1188.4 1228.55,1188.4 1273.5,1233.35 1273.5,1283.66 1315.28,1325.43 1409.57,1325.43 1420,1315
Leg2_MSel0: P7.29 U3.7 U9.25 | length 1241.5
  Top Layer w7: 1417.85,1345.43 1428.6,1334.69 U3.7
  Top Layer w10: P7.29 394.53,1180.47 468.44,1180.47 505.47,1217.5 542.5,1217.5 U9.25 594.53,1180.47 942.22,1180.47 1107.18,1345.43 1417.85,1345.43
Leg2_MSel1: P7.30 U3.6 U9.24 | length 1091.4
  Top Layer w7: 1415,1365.43 1416.5,1363.93 1425.51,1363.93 1432.67,1356.78 1439.33,1356.78 U3.6@1441.73,1354.37
  Top Layer w10: P7.30 494.53,1269.53 568.44,1269.53 605.47,1232.5 642.5,1232.5 U9.24 958.47,1225 1098.9,1365.43 1415,1365.43
Leg2_PWM0: J2.2 U1.8 | length 1811.7
  Top Layer w10: U1.8 1587.8,2101.9 1625,2064.7 v1(1625,1880)
  Bottom Layer w10: v1(1625,1880) 1725,1780 1725,1003.21 2063.15,665.06 J2.2
Leg2_PWM1: J4.2 U1.7 | length 1665.4
  Top Layer w10: U1.7 1562.2,2099.21 1576.16,2085.25 1576.16,1991.16 v1(1575,1990)
  Bottom Layer w10: J4.2 1468.15,980.18 1495,1007.03 1495,1858.28 1575,1938.28 v1(1575,1990)
Leg2_PWM2: J6.2 U1.6 | length 1893.7
  Top Layer w10: v1(1536.16,2059.05) 1536.39,2059.28 1536.39,2194.62 U1.6
  Bottom Layer w10: J6.2 868.15,1259.72 1535,1926.57 1535,2060 1535.95,2059.05 v1(1536.16,2059.05)
Leg3_fb0: C13.2 J7.1 U4.8 | length 1095.7
  Top Layer w7: U4.8 3805,2720
  Top Layer w10: 3805,2720 4110,3025 4110,3087.91 C13.2 4111.85,3090.24 J7.1
Leg3_fb1: C14.2 J9.1 U4.3 | length 733.3
  Top Layer w7: U4.3 3310,2720
  Top Layer w10: 3310,2720 3403.25,2813.25 3403.25,2966.32 3517.09,3080.16 C14.2 3515,3092.09 J9.1
Leg3_fb2: C15.2 J11.1 U4.1 | length 762.9
  Top Layer w10: J11.1 2925,3097.09 C15.2 2927.09,3085.16 2947.68,3064.57 3030.43,3064.57 3275,2820 U4.1@3275,2760.59
Leg3_MSel0: P1.6 U4.7 U9.5 | length 2671
  Top Layer w7: U4.7 3524.68,2700.32
  Top Layer w10: U9.5 P1.6 2425,1200 2625,1200 2810.43,1385.43 3310.43,1385.43 3550,1625 3550,2675 3524.68,2700.32
Leg3_MSel1: P1.5 U4.6 U9.4 | length 2706.1
  Top Layer w7: U4.6 3504.14,2680.63
  Top Layer w10: U9.4 P1.5 2255,1125 2350,1220 2616.72,1220 2802.15,1405.43 3302.15,1405.43 3530,1633.28 3530,2654.77 3504.14,2680.63
Leg3_PWM0: J7.2 U1.15 | length 2740.7
  Top Layer w10: U1.15 1745.43,2425 v1(1870,2425)
  Bottom Layer w10: v1(1870,2425) 2103.28,2425 2460,2781.72 2460,2948.43 2541.57,3030 3713.43,3030 J7.2
Leg3_PWM1: J9.2 U1.16 | length 2190.9
  Top Layer w10: U1.16 1718.47,2427.88 1718.47,2457.95 1745.52,2485 v1(1870,2485)
  Bottom Layer w10: v1(1870,2485) 2135,2485 2440,2790 2440,2956.72 2533.28,3050 3136.57,3050 J9.2
Leg3_PWM2: J11.2 U1.17 | length 1629.4
  Top Layer w10: U1.17 1692.87,2427.87 1692.87,2460.64 1777.23,2545 v1(1870,2545)
  Bottom Layer w10: v1(1870,2545) 2166.72,2545 2420,2798.28 2420,2965 2743.03,3288.03 ccw(c2728.15,3330) 2770.12,3315.12 2785,3330 J11.2
Leg4_fb0: C16.2 J8.1 U5.8 | length 1180.7
  Top Layer w7: U5.8 1651.89,2684.72 1686.89,2684.72 1694.09,2677.52
  Top Layer w10: 1694.09,2677.52 1694.17,2677.43 1694.17,2650.86 1700.03,2645 1954.48,2645 2094.53,2785.05 2094.53,2932.5 2156.03,2994.01 2211.53,2994.01 2262.09,3044.57 C16.2 2260.28,3096.81 J8.1
Leg4_fb1: C17.2 J10.1 U5.3 | length 763
  Top Layer w7: U5.3 1545,2685
  Top Layer w10: 1545,2685 1585,2725 1585,2960 1667.09,3042.09 C17.2 1665,3092.09 J10.1
Leg4_fb2: C18.2 J12.1 U5.1 | length 880
  Top Layer w7: 1420.63,2724.37 U5.1
  Top Layer w10: J12.1 1063.43,3098.66 C18.2 1067.09,3085.16 1087.68,3064.57 1173.4,3064.57 1294.53,2943.44 1294.53,2817.5 1387.03,2725 1420,2725
Leg4_MSel0: P7.6 U5.7 U9.48 | length 1338
  Top Layer w7: 1557.13,2665.32 U5.7
  Top Layer w10: P7.6 494.53,2469.53 568.44,2469.53 605.47,2432.5 642.5,2432.5 U9.48 936.91,2425 1136.64,2624.72 1516.54,2624.72 1557.13,2665.32
Leg4_MSel1: P7.5 U5.6 U9.49 | length 1477.9
  Top Layer w7: 1630,2605 1651.61,2626.61 U5.6
  Top Layer w10: P7.5 394.53,2380.47 468.44,2380.47 505.47,2417.5 542.5,2417.5 U9.49 559.39,2415.61 594.07,2415.61 629.21,2380.47 920.67,2380.47 1144.92,2604.72 1524.82,2604.72 1525.1,2605 1630,2605
Leg4_PWM0: J8.2 U1.20 | length 1149.6
  Top Layer w10: U1.20 1613.39,2537.56 1630,2554.18 v1(1630,2565)
  Bottom Layer w10: v1(1630,2565) 1703.83,2638.83 1733.83,2638.83 1800,2705 1800,2968.15 J8.2
Leg4_PWM1: J10.2 U1.21 | length 919.1
  Top Layer w10: v1(1560,2565) 1560,2564.18 1587.8,2536.38 U1.21
  Bottom Layer w10: v1(1560,2565) 1563.29,2568.29 1563.29,3326.71 J10.2
Leg4_PWM2: J12.2 U1.22 | length 1210.1
  Top Layer w10: v1(1494.69,2550.69) 1499.31,2550.69 1562.2,2487.8 U1.22
  Bottom Layer w10: J12.2 965,3165.86 1105,3025.86 1105,2875 1110.86,2869.14 1131.17,2869.14 1131.56,2869.53 1180.47,2869.53 1193.04,2856.96 ccw(c1280.06,2855.06) 1218.51,2793.51 ccw(c1246.67,2821.67) 1218.66,2793.37 ccw(c1250,2825) 1249.52,2780.47 1479.31,2550.69 v1(1494.69,2550.69)
MISO: P7.4 U9.50 | length 236.9
  Top Layer w10: P7.4 494.53,2569.53 568.44,2569.53 605.47,2532.5 642.5,2532.5 U9.50
MOSI: P7.3 U9.51 | length 236.9
  Top Layer w10: P7.3 394.53,2480.47 468.44,2480.47 505.47,2517.5 542.5,2517.5 U9.51
NetF1_1: F1.1 U8.1 | length 207.1
  Top Layer w50: F1.1 4635,2275 U8.1
NetF1_2: F1.2 Q1.2 | length 205
  Top Layer w50: F1.2 Q1.2
NetHC-1_4: HC-1.4 R11.1 R12.2 | length 234.9
  Top Layer w10: R12.2 3185.12,2230 ; R11.1 3185.12,2230 ; HC-1.4 3185.12,2230
NetLCD1_3: LCD1.3 R13.1 R14.1 | length 248.9
  Top Layer w10: LCD1.3 1080.12,1645 R13.1 R14.1
NetP1_1: P1.1 U9.0 | length 100
  Top Layer w10: U9.0 P1.1
NetP1_2: P1.2 U9.1 | length 100
  Top Layer w10: U9.1 P1.2
NetP1_3: P1.3 U9.2 | length 100
  Top Layer w10: U9.2 P1.3
NetP1_4: P1.4 U9.3 | length 100
  Top Layer w10: U9.3 P1.4
NetP1_7: P1.7 U9.6 | length 100
  Top Layer w10: U9.6 P1.7
NetP2_3: P2.3 U9.62 | length 100
  Top Layer w10: P2.3 U9.62
NetP2_4: P2.4 U9.63 | length 100
  Top Layer w10: P2.4 U9.63
NetP2_5: P2.5 U9.64 | length 100
  Top Layer w10: P2.5 U9.64
NetP2_6: P2.6 U9.65 | length 100
  Top Layer w10: P2.6 U9.65
NetP2_7: P2.7 U9.66 | length 100
  Top Layer w10: P2.7 U9.66
NetP3_2: P3.2 U9.9 | length 100
  Top Layer w10: U9.9 P3.2
NetP3_3: P3.3 U9.10 | length 100
  Top Layer w10: U9.10 P3.3
NetP3_4: P3.4 U9.11 | length 100
  Top Layer w10: U9.11 P3.4
NetP3_5: P3.5 U9.12 | length 100
  Top Layer w10: U9.12 P3.5
NetP3_6: P3.6 U9.13 | length 100
  Top Layer w10: U9.13 P3.6
NetP4_3: P4.3 U9.16 | length 100
  Top Layer w10: U9.16 P4.3
NetP4_4: P4.4 U9.17 | length 100
  Top Layer w10: U9.17 P4.4
NetP4_5: P4.5 U9.18 | length 100
  Top Layer w10: U9.18 P4.5
NetP4_6: P4.6 U9.19 | length 100
  Top Layer w10: U9.19 P4.6
NetP5_2: P5.2 U9.74 | length 100
  Top Layer w10: P5.2 U9.74
NetP5_3: P5.3 U9.73 | length 100
  Top Layer w10: P5.3 U9.73
NetP5_4: P5.4 U9.72 | length 100
  Top Layer w10: P5.4 U9.72
NetP5_5: P5.5 U9.71 | length 100
  Top Layer w10: P5.5 U9.71
NetP5_6: P5.6 U9.70 | length 100
  Top Layer w10: P5.6 U9.70
NetP5_7: P5.7 U9.69 | length 100
  Top Layer w10: P5.7 U9.69
NetP5_8: P5.8 U9.68 | length 100
  Top Layer w10: P5.8 U9.68
NetQ1_1: Q1.1 R8.2 | length 210
  Top Layer w10: Q1.1 4735,3189.88 R8.2
NetR1_1: R1.1 U1.23 | length 426.8
  Top Layer w10: U1.23 1539.33,2422.44 1539.33,2392.37 1581.7,2350 R1.1@1910,2350 ; R1.1@1921.73,2358.5 R1.1@1925,2355.24
SCK: P7.2 U9.52 | length 236.9
  Top Layer w10: P7.2 494.53,2669.53 568.44,2669.53 605.47,2632.5 642.5,2632.5 U9.52
SCL: J13.4 P4.8 R10.1 U1.26 U9.21 | length 2977.3
  Top Layer w10: R10.1 U9.21 P4.8 ; v1(1330,1530) 1426.72,1530 1456.72,1560 1470,1560 ; U1.26 1459.84,2373.04 1480,2352.88 v1(1480,2342.06) ; v1(1470,1950) 1470,1560 ; J13.4 2542.5,1712.5 2505.47,1712.5 2468.44,1749.53 2431.56,1749.53 2400,1717.97 2400,1692.03 2267.97,1560 1470,1560
  Bottom Layer w10: P4.8 1030,1205 1030,1234.85 1325.15,1530 v1(1330,1530) ; v1(1470,1950) 1475,1955 1475,2337.06 v1(1480,2342.06)
SDA: J13.5 P4.7 R9.1 U1.27 U9.20 | length 3296.1
  Top Layer w10: R9.1 U9.20 P4.7 ; v1(1395,1470) 1465,1540 2345,1540 ; U1.27 1434.25,2331.24 1505.49,2260 v1(1550,2260) ; v1(2345,1580) 2345,1540 ; J13.5 2450,1610 2380,1540 2345,1540
  Bottom Layer w10: P4.7 1050,1226.57 1293.43,1470 v1(1395,1470) ; v1(1550,2260) 1615,2260 2295,1580 v1(2345,1580)
SS: P7.1 U9.53 | length 236.9
  Top Layer w10: P7.1 351.64,2623.36 388.67,2623.36 431.56,2580.47 468.44,2580.47 505.47,2617.5 542.5,2617.5 U9.53
pads on no net: J13.2 J13.6 J14.1 J14.2 J14.3 J14.4 J14.5 J14.6 U1.3 U1.4 U1.5 U1.9 U1.13 U1.18 U1.19 U1.24 U2.2 U3.2 U4.2 U5.2 U9.54 U9.55 U9.56 U9.77 U9.80 U9.81

## Polygon pours and split planes (outlines as drawn)
+5 on Top Layer "+5_L01_P000" (solid, pour order 0): 20,3925 30,3915 4965,3915 4965,35 4960,40 30,40
GND on Bottom Layer "GND_L02_P001" (solid, pour order 1): 25,3915 35,3905 4970,3905 4970,25 4965,30 35,30

## Silkscreen, mask and mechanical layers (free items; w line width, h text height)
Top Overlay:
  lines w10: 4575,595 4575,575 4580,570 4745,570 4755,580 4755,605
  text "5V GND" at 90,2980.67 h60
  text "3V3" at 4580,470 h60
Bottom Overlay:
  region: 2533 vertices and 31 holes, not listed, extent 57.66,3010.77 658.81,3636.85
  text "RAS Quadruped Project" at 1860,3795 h200
  text "Designer: Gabe Donados" at 915,3695 h80
  text "Rev 1" at 915,3620 h80

## Text inside footprints (layer, text, board x,y; h text height)
C5: Top Overlay "+" at 2384.88,282.09 h78.74 r90
C6: Top Overlay "+" at 2500.12,3614.02 h78.74 r270
LCD1: Top Overlay "2" at 870,1435 h50 r90; Top Overlay "1" at 970,1445 h50 r90; Top Overlay "15" at 970,2320 h50 r90; Top Overlay "16" at 870,2320 h50 r90
P7: Top Overlay "2" at 430,2735 h50 r270; Top Overlay "1" at 330,2725 h50 r270; Top Overlay "31" at 330,1050 h50 r270; Top Overlay "32" at 430,1055 h50 r270
U9: Bottom Overlay "Arduino Mega R3" at 2200,2375 h60 r270